# EAGLE board leddriverv2 (EAGLE 9.2.2)
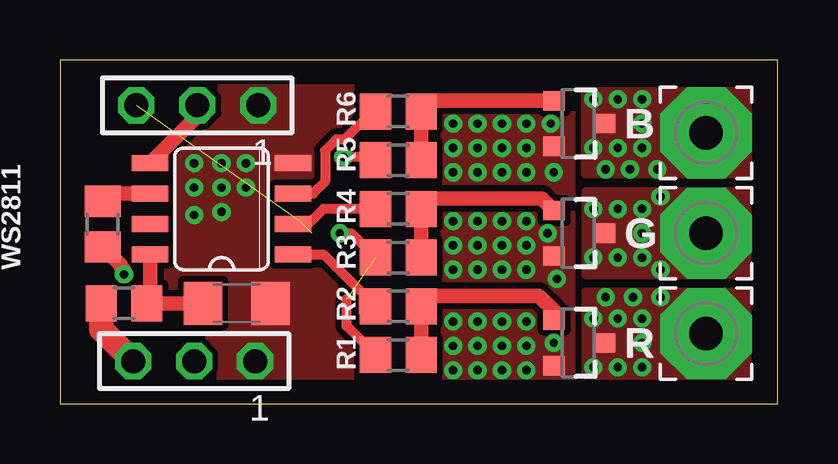
[diagram p0: board, top side]
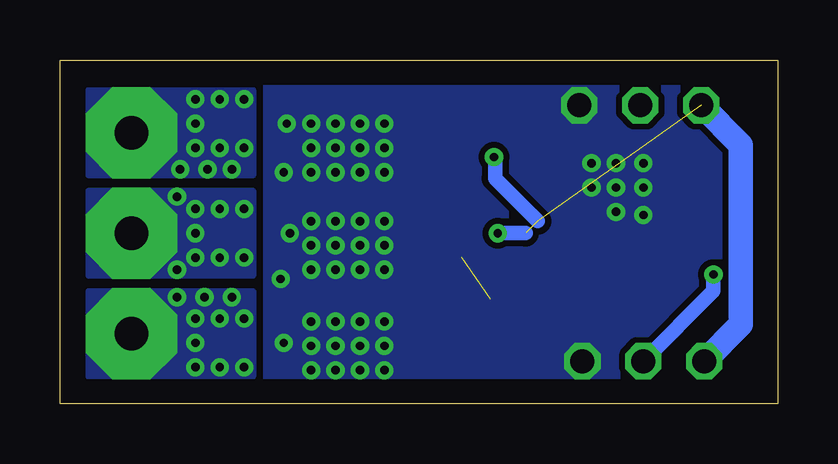
[diagram p1: board, bottom side, seen from below]

Size 29.9 x 14.34 mm. Coordinates in mm from the lower left corner, seen from the top.
Outline: 0,0 29.9,0 29.9,14.34 0,14.34 0,0
Copper layers (1*16): Top 0.035mm / dielectric 1.5mm / Bottom 0.035mm
Design rules "default *": minimum track width 6mil, minimum drill 0.35mm, track to track 6mil, track to pad 6mil, pad to pad 6mil, via to via 6mil, smd to smd 6mil, copper to edge 40mil, drill to drill 6mil, minimum pad ring 10mil, minimum via ring 8mil, stop-mask expansion 4mil, vias tented up to drill 100mil, thermal gap 10mil

## Footprints (pad centres in the part's own frame; a part is rotated, then mirrored left to right if it is on the bottom)
C1206 = smd 1.6 x 1.8: 1 -1.4,0; 2 1.4,0
SO08-SKINNYPADS = smd 0.66 x 1.524: 1 -1.905,-2.973; 2 -0.635,-2.973; 3 0.635,-2.973; 4 1.905,-2.973; 5 1.905,2.973; 6 0.635,2.973; 7 -0.635,2.973; 8 -1.905,2.973
3,81/1,4 = drill 1.397 pad 3.81 octagon: 1 0,0
R0805 = smd 1.3 x 1.5: 1 -0.95,0; 2 0.95,0
SOT23-3 = smd 0.8 x 0.9: 1 -0.95,-1; 2 0.95,-1; 3 0,1.1
TSW-103-XX-G-S = drill 1 pad 1.5 octagon: 1 2.54,0; 2 0,0; 3 -2.54,0

## Placement (x,y rotation side)
C1  0.1uF  [C1206]  7.37,4.19 180 top
IC1  WS2811-SOP8  [SO08-SKINNYPADS]  6.73,8.13 90 top
PAD1  [3,81/1,4]  26.92,2.92 0 top
PAD2  [3,81/1,4]  26.92,7.11 0 top
PAD3  [3,81/1,4]  26.92,11.3 0 top
R1  10k  [R0805]  14.1,2.03 0 top
R2  100  [R0805]  14.1,4.06 0 top
R3  10k  [R0805]  14.1,6.1 0 top
R4  100  [R0805]  14.1,8.13 0 top
R5  10k  [R0805]  14.1,10.16 0 top
R6  100  [R0805]  14.1,12.19 0 top
R7  2.7k  [R0805]  2.67,4.19 180 top
R8  33  [R0805]  1.78,7.49 270 top
TB  5.8A/30V/35mΩ  [SOT23-3]  21.59,11.68 270 top
TG  5.8A/30V/35mΩ  [SOT23-3]  21.59,7.11 270 top
TR  5.8A/30V/35mΩ  [SOT23-3]  21.59,2.54 270 top
X3  TSW-103-07-G-S  [TSW-103-XX-G-S]  5.59,1.78 0 top
X4  TSW-103-07-G-S  [TSW-103-XX-G-S]  5.71,12.45 0 top

## Library data of the parts
C1 = rcl; SPICEPREFIX: C
IC1 = adafruit_wsled
PAD1-PAD3 = wirepad
R1-R8 = rcl; SPICEPREFIX: R
TB TG TR = SparkFun-DiscreteSemi; PROD_ID: TRANS-12988
X3 X4 = con-samtec; MF: Samtec Inc.; MPN: TSW-103-07-G-S

## Nets
+12V: R1.1 R3.1 R5.1 R7.2 X3.3 X4.3
B: IC1.3 R6.1
DIN_IN: R8.2 X3.2
DOUT_OUT: IC1.5 X4.2
G: IC1.2 R4.1
GND: C1.1 IC1.4 TB.2 TG.2 TR.2 X3.1 X4.1
N$1: IC1.6 R8.1
N$2: R3.2 R4.2 TG.1
N$3: R5.2 R6.2 TB.1
N$4: R1.2 R2.2 TR.1
NEG_B: PAD3.1 TB.3
NEG_G: PAD2.1 TG.3
NEG_R: PAD1.1 TR.3
R: IC1.1 R2.1
VDD: C1.2 IC1.8 R7.1

## Tracks (layer width: path | path; a pad name or v marks a point on that pad's centre or on a via)
+12V  (via drill 0.35)  (3 unrouted)
  Top 0.406: v11.66,7.11 12.13,7.11 R3.1 | R5.1 13.02,10.29 v11.81,10.29 | 11.94,4.36 11.94,3.24 R1.1
  Top 1.016: X3.3 1.72,3.11 R7.2
  Bottom 0.61: 10.5,7.11 v11.66,7.11 | 9.99,7.62 11.77,9.4 11.77,10.24 v11.81,10.29
  Bottom 1.016: X4.3 1.52,10.79 1.52,3.3 X3.3
B
  Top 0.406: R6.1 13.02,12.19 11.85,11.02 11.51,11.02 11.05,10.56 11.05,9.27 10.54,8.76 IC1.3
DIN_IN  (via drill 0.35)
  Top 0.61: R8.2 2.54,5.78 2.54,5.7 2.67,5.57 v2.67,5.39
  Bottom 0.61: v2.67,5.39 2.67,4.7 X3.2
DOUT_OUT
  Top 0.61: IC1.5 5.71,11.99 X4.2
G
  Top 0.305: 10.03,7.49 10.34,7.49
  Top 0.406: 12.75,8.13 R4.1 10.97,8.13 10.34,7.49 | IC1.2 10.03,7.49
GND  (via drill 0.35)
  other vias: 16.38,11.68 16.38,7.62 16.38,3.43 17.4,11.68 18.41,11.68 19.43,11.68 16.38,10.67 16.38,9.65 17.4,10.67 17.4,9.65 18.41,9.65 18.41,10.67 19.43,9.65 20.57,9.65 20.45,11.68 16.38,2.41 16.38,1.4 17.4,3.43 17.4,2.41 17.4,1.4 18.41,3.43 18.41,2.41 18.41,1.4 19.43,1.4 19.43,2.41 17.4,7.62 18.41,7.62 16.38,6.6 17.4,6.6 18.41,6.6 16.38,5.59 17.4,5.59 18.41,5.59 19.43,7.62 20.32,7.11 19.43,5.59 20.7,5.21 5.59,10.03 6.73,9.02 5.59,7.87 6.73,8 7.75,10.03 6.73,10.03 7.75,9.02 5.59,9.02 19.43,3.43 20.57,2.54 19.43,6.6 19.43,10.67
  pour Top (isolate 0.254, no thermals): -0.63,14.1 13.46,14.1 13.46,0 -0.63,0
  pour Bottom (isolate 0.254, no thermals): -0.25,14.22 -0.25,-0.25 21.21,-0.25 21.21,14.22
  pour Top (isolate 0.254, no thermals): 15.88,12.19 21.34,12.19 21.34,8.64 15.88,8.64
  pour Top (isolate 0.254, no thermals): 15.88,8 21.34,8 21.34,4.06 15.88,4.06
  pour Top (isolate 0.254, no thermals): 15.88,3.94 21.34,3.94 21.34,0.25 15.88,0.25
N$1
  Top 0.61: 1.84,8.51 R8.1 2.1,8.76 IC1.6
N$2
  Top 0.61: R3.2 R4.2 15.49,8.57 20.08,8.57 TG.1
N$3
  Top 0.61: R5.2 R6.2 15.49,12.63 TB.1
N$4
  Top 0.61: R1.2 R2.2 15.49,4.51 19.96,4.51 20.59,3.87 TR.1
NEG_B  (via drill 0.35)
  other vias: 22.23,12.7 23.24,12.7 24.26,12.7 24.26,11.68 24.26,10.67 23.24,10.67 22.23,10.67 23.75,9.78 22.73,9.78 24.89,9.78
  pour Top (no thermals): 28.7,9.53 21.84,9.53 21.84,13.08 28.7,13.08
  pour Bottom (no thermals): 21.84,13.08 21.84,9.53 28.7,9.53 28.7,13.08
NEG_G  (via drill 0.35)
  other vias: 22.23,8.13 23.24,8.13 24.26,8.13 24.26,7.11 24.26,6.1 23.24,6.1 22.23,6.1 25.02,8.64 25.02,5.59
  pour Top (no thermals): 28.7,8.89 21.84,8.89 21.84,5.33 28.7,5.33
  pour Bottom (no thermals): 21.84,8.89 21.84,5.33 28.7,5.33 28.7,8.89
NEG_R  (via drill 0.35)
  other vias: 22.23,3.56 23.24,3.56 24.26,3.56 24.26,2.54 24.26,1.52 23.24,1.52 22.23,1.52 22.73,4.45 23.88,4.45 25.02,4.45
  pour Top (no thermals): 28.7,4.7 21.84,4.7 21.84,1.14 28.7,1.14
  pour Bottom (no thermals): 21.84,4.7 21.84,1.14 28.7,1.14 28.7,4.7
R
  Top 0.406: R2.1 12.89,4.06 12.64,3.81 12.64,4.57 10.99,6.22 IC1.1 10.09,6.22
VDD
  Top 0.61: IC1.8 3.76,4.33 | 3.76,4.33 3.76,4.21 3.77,4.19 C1.2 | 3.76,4.33 R7.1

## Text on the board
tNames: R6 | B | R8 | R7 | R5 | C1 | R4 | G | WS2811 | R3 | R2 | R | R1